# Allegro board ETDS_PCB_AN_V1_2.brd
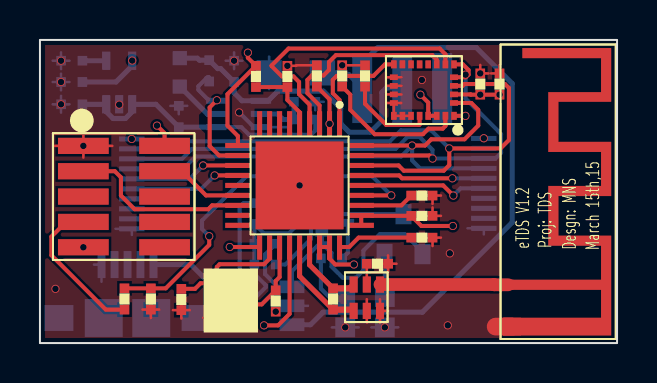
[diagram p0: board, top side]
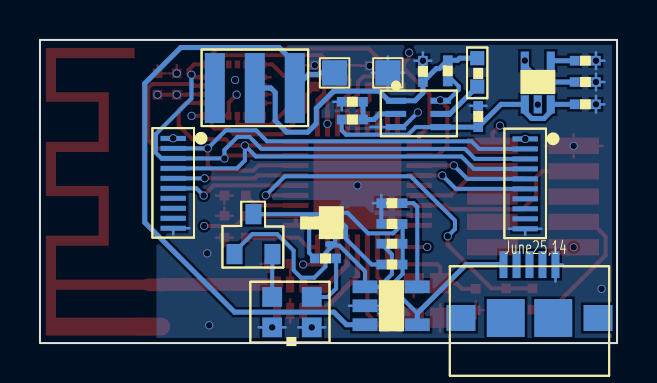
[diagram p1: board, bottom side, seen from below]

Outline 28.88 x 15.19 mm; copper layers: TOP, GND, VCC3V, BOTTOM. Coordinates in mm from the lower left corner of the outline.
Outline path: rectangle 0,0 28.88,15.19

## Design rules (mm)
nets with their own width: min track width 0.305; nets N11200813 N11200821
nets with their own width: min track width 0.508; nets ANT_OUT

## Placement (name value [footprint] x y rotation side)
C1  1uF  [C0402]  2.55 12.4 180 bottom
C2  10nF  [C0402]  2.55 13.46 180 bottom
C3  1uF  [C0402]  2.55 11.28 180 bottom
C4  22pF  [C0402]  11.11 3.07 270 top
C5  22pF  [C0402]  6.39 3.15 270 top
C7  1uF  [C0402]  18.15 6.71 0 top
C8  1uF  [C0402]  18.15 5.69 0 top
C11  22pF  [C0402]  15.93 3.29 0 top
C12  10uF  [C0402]  6.26 10.39 90 bottom
C13  10uF  [C0402]  9.03 12.65 90 bottom
C32  1uF  [C0402]  10.3 6.65 0 bottom
C40  1nF  [C0402]  4.86 3.18 270 top
C42  10uF  [C0402]  14.54 12.42 90 top
C43  0.1uF  [C0402]  23.69 12.01 90 top
C44  1nF  [C0402]  15.58 14.35 270 top
C45  100nF  [C0402]  15.81 12.42 90 top
C46  0.1uF  [C0402]  22.72 12.01 90 top
H1  Header1X1  [H1]  14.87 12.8 180 bottom
H4  Header1X1  [H1]  12.2 12.8 180 bottom
H7  Header5X1  [TE_USB_2174507-2]  4.38 1.26 180 bottom
H10  Header5X2  [H10]  5.77 5.13 180 bottom
H11  Header5X2  [H10]  23.38 5.16 180 bottom
H12  Header1X1  [ANT_W]  24.37 6.81 0 top
J2  CON5  [H5X2]  0.65 4.17 0 top
L1  10nH  [L0402]  15 1.35 90 top
L3  4.7uH  [L0805]  6.49 12.27 90 bottom
LED1  APBL3025  [LEDAP1]  14.39 3.07 0 bottom
Q1  DMP22D6UT  [MOS_DMP]  13.68 5.21 90 bottom
Q2  DMN5L06K  [MOS_DMN]  19.75 3.78 180 bottom
R4  56k  [R0402]  18.25 4.95 0 top
R9  160k  [R0402]  12.38 12.42 0 bottom
R10  1.2meg  [R0402]  14.11 10.87 180 bottom
R11  1.2meg  [R0402]  8.14 12.78 90 bottom
R28  10k  [R0402]  10.4 5.31 0 bottom
R29  8k  [R0402]  12.13 3.61 180 bottom
R40  3.9k  [R0402]  13.73 4.57 0 bottom
R41  100k  [R0402]  11.14 12.5 90 top
R42  200k  [R0402]  12.05 14.22 270 top
R43  1k  [R0402]  10.4 7.34 0 bottom
R44  2.7k  [R0402]  4.56 1.35 90 top
S1  CSS-1210B  [SWITCH]  20.79 14.71 270 bottom
U1  TPS71733  [TPS71730]  4.97 11.38 180 bottom
U2  -  [LTC4054]  13.35 3.28 270 bottom
U6  balunn  [BALUNN]  15.27 1.05 0 top
U7  1  [CC2510]  12.99 7.9 270 top
U9  Value  [TPS61220]  11.82 12.65 270 bottom
U10  -  [LSM9DS1]  19.22 12.67 180 top
Y1  26MHz  [CRYST_26M]  11.06 0.48 90 top

## Library data of the parts
C1 C12 C13 = C: room: 2
C2 C3 C11 = C: room: 1
C4 C5 C7 C8 C32 C40 C42-C46 = C
H1 = Header1X1_2: room: 2
H4 H7 = Header1X1_1: room: 2
H10 H11 = Header7X1_0
H12 = Header1X1_0: room: 1
J2 = CON5_0
L1 = INDUCTOR
L3 = INDUCTOR: room: 1
LED1 = BRPG1204_0
Q1 = MOSFET P_0
Q2 = DMN5L06K
R4 R28 R29 R40-R44 = R
R9-R11 = R: room: 1
S1 = SW_0: room: 1
U1 = TPS71730_0: room: 1
U2 = LTC4054_0
U6 = balunn
U7 = cc2510f32rspr_1
U9 = TPS61220DCKR
U10 = LSM9DS1
Y1 = CRYSTAL_2

## Footprints (pads in the part's own frame, mm; a bottom-side part is the same pattern mirrored in y, then rotated)
ANT_W
  rect 0.508x0.508 smd: 1(-0.94,-3.886)
  rect 0.889x0.889 smd: 2(-0.749,-5.982)
BALUNN
  rect 0.406x0.813 smd: 1(1.753,1.88) 2(1.092,1.88) 3(0.432,1.88) 4(0.432,0.559) 5(1.092,0.559) 6(1.753,0.559)
C0402
  rect 0.483x0.483 smd: 1(0.432,0.686) 2(1.499,0.686)
CC2510
  rect 1.27x0.254 smd: 1(-3.086,2) 2(-3.086,1.5) 3(-3.086,1) 4(-3.086,0.5) 5(-3.086,0) 6(-3.086,-0.5) 7(-3.086,-1) 8(-3.086,-1.5) 9(-3.086,-2) 19(3.086,-2) 20(3.086,-1.5) 21(3.086,-1) 22(3.086,-0.5) 23(3.086,0) 24(3.086,0.5) 25(3.086,1) 26(3.086,1.5) 27(3.086,2)
  rect 0.254x1.27 smd: 10(-2,-3.086) 11(-1.5,-3.086) 12(-1,-3.086) 13(-0.5,-3.086) 14(0,-3.086) 15(0.5,-3.086) 16(1,-3.086) 17(1.5,-3.086) 18(2,-3.086) 28(2,3.086) 29(1.5,3.086) 30(1,3.086) 31(0.5,3.086) 32(0,3.086) 33(-0.5,3.086) 34(-1,3.086) 35(-1.5,3.086) 36(-2,3.086)
  rect 4.4x4.4 smd: 37(0,0)
CRYST_26M
  rect 1.016x1.016 smd: 1(0.787,0.889) 2(2.515,2.21) 3(2.515,0.889) 4(0.787,2.21)
H1
  rect 1.27x1.27 smd: 1(0.737,0.737)
H5X2
  rect 2.54x0.813 smd: 1(1.524,5.715) 2(5.588,5.715) 3(1.524,4.445) 4(5.588,4.445) 5(1.524,3.175) 6(5.588,3.175) 7(1.524,1.905) 8(5.588,1.905) 9(1.524,0.635) 10(5.588,0.635)
H10
  rect 1.27x0.254 smd: 1(1.168,5.097) 2(1.168,4.597) 3(1.168,4.097) 4(1.168,3.596) 5(1.168,3.096) 6(1.168,2.596) 7(1.168,2.096) 8(1.168,1.596) 9(1.168,1.096) 10(1.168,0.596)
L0402
  rect 0.483x0.483 smd: 1(0.33,0.33) 2(1.397,0.33)
L0805
  rect 0.711x0.711 smd: 1(0.584,0.508) 2(2.007,0.508)
LEDAP1
  rect 0.991x0.991 smd: 1(0.889,0.762) 2(0.889,2.286) 3(2.87,0.762) 4(2.87,2.286)
LSM9DS1
  rect 0.28x0.4 smd: 1(-1.505,1.29) 6(-1.505,-1.29) 7(-1.075,-1.29) 8(-0.645,-1.29) 9(-0.215,-1.29) 10(0.215,-1.29) 11(0.645,-1.29) 12(1.075,-1.29) 13(1.505,-1.29) 18(1.505,1.29) 19(1.075,1.29) 20(0.645,1.29) 21(0.215,1.29) 22(-0.215,1.29) 23(-0.645,1.29) 24(-1.075,1.29)
  rect 0.4x0.28 smd: 2(-1.505,0.645) 3(-1.505,0.215) 4(-1.505,-0.215) 5(-1.505,-0.645) 14(1.505,-0.645) 15(1.505,-0.215) 16(1.505,0.215) 17(1.505,0.645)
LTC4054
  rect 0.635x1.245 smd: 1(0.457,0.737) 2(1.407,0.737) 3(2.357,0.737) 4(2.357,3.353) 5(0.457,3.353)
MOS_DMN
  rect 0.8x1.016 smd: 1(0.605,0.676) 2(2.504,0.676) 3(1.554,2.676)
MOS_DMP
  rect 0.4x0.635 smd: 1(0.32,0.43) 2(1.32,0.43) 3(0.82,1.73)
R0402
  rect 0.483x0.483 smd: 1(0.33,0.33) 2(1.397,0.33)
SWITCH
  rect 3.505x1 smd: 1(1.93,4.661) 2(1.93,2.661) 3(1.93,0.661)
TE_USB_2174507-2
  rect 0.4x1.35 smd: 1(-1.3,2.675) 2(-0.648,2.675) 3(0,2.675) 4(0.65,2.675) 5(1.3,2.675)
  rect 1.9x1.9 smd: 6(1.189,0) 7(-1.189,0)
  rect 1.45x1.3 smd: 8(3.429,0) 9(-3.429,0)
TPS61220
  rect 0.305x1.016 smd: 1(0.508,0.762) 2(1.168,0.762) 3(1.829,0.762) 4(1.829,2.997) 5(1.168,2.997) 6(0.508,2.997)
TPS71730
  rect 0.406x0.914 smd: 1(0.349,0.584) 2(0.999,0.584) 3(1.649,0.584) 4(1.649,2.769) 5(0.349,2.769)

## Nets
GND: C1.2 C2.2 C3.2 C4.2 C5.2 C7.2 C8.2 C11.2 C12.2 C13.2 C32.2 C40.2 C42.2 C43.2 C44.1 C45.2 C46.2 H4.1 H7.5(GND) H10.10 H11.10 H12.2 J2.1 LED1.2(-1) LED1.4(-2) R4.2 R9.2 R42.1 R43.2 U1.2(GND) U2.2(GND) U6.5(GND2) U6.6(GND3) U7.37(GND EXPOSED) U9.3(GND) U10.14(RES1) U10.15(RES2) U10.16(RES3) U10.17(RES4) U10.18(RES5) U10.19(GND1) U10.20(GND2) Y1.3(GND#3) Y1.4(GND#4)
VBAT: C13.1 L3.2 R11.2 S1.2(CONT1) U9.1(VIN)
VCC3V: C1.1 C8.1 C42.1 C43.1 C46.1 H10.1 H11.1 J2.2 J2.9 R41.2 U1.5(OUT) U7.2(DVDD#2) U7.10(DVDD#10) U7.19(AVDD#19) U7.22(AVDD#22) U7.25(AVDD#25) U7.26(AVDD#26) U7.28(GUARD) U7.29(AVDD_DREG) U10.1(VDDIO1) U10.3(VDDIO2) U10.22(VDD1) U10.23(VDD2)
ANT_OUT: H12.1 U6.1(UBP)
BAT: H1.1 S1.1(POLE) U2.3(BAT)
DDEN: R11.1 U7.11(P0_5) U9.6(EN)
DEN_AG: U7.1(P1_2) U10.13(DEN_AG)
RESET_N: C40.1 R44.2 U7.31(RESET_N)
SPI_MISO: H10.3 H11.3 U7.35(P1_4) U10.5(SDO_AG) U10.6(SDO_M)
SPI_MOSI: H10.2 H11.2 U7.34(P1_5) U10.4(SDI)
SPI_NCS_S1: H10.5 U7.12(P0_6)
SPI_NCS_S2: H10.6 U7.13(P0_7)
SPI_NCS_S3: H11.5 U7.33(P1_6)
SPI_NCS_S4: H11.6 U7.32(P1_7)
SPI_NCS_S5: U7.3(P1_1) U10.8(CS_M)
SPI_NCS_S6: U7.4(P1_0) U10.7(CS_AG)
SPI_SCK: H10.4 H11.4 U7.36(P1_3) U10.2(SCL/SPC)
V_5V: C32.1 H7.1(5V) Q1.2(DRAIN) R28.1 R29.2 U2.4(VCC)
N11200809: C11.1 U6.2(GND1)
N11200813: L1.2 U6.3(BP1) U7.24(RF_N)
N11200821: L1.1 U6.4(BP2) U7.23(RF_P)
N11200881: R41.1 R42.2 U7.5(P0_0)
N11201053: C7.1 U7.30(DCOUPL)
N11201105: R4.1 U7.27(RBIAS)
N11201161: C4.1 U7.21(XOSC_Q1) Y1.1
N11201169: C5.1 U7.20(XOSC_Q2) Y1.2
N11201465: J2.7 R44.1
N11201477: J2.3 U7.16(P2_2)
N11201481: J2.4 U7.15(P2_1)
N11202227: Q2.3(D) R29.1
N11202241: Q1.1(GATE) Q2.1(G) R28.2 U2.1(\\C\H\R\G)
N11202285: LED1.3(GREEN) Q2.2(S)
N11202289: LED1.1(RED) R40.1
N11202301: Q1.3(SOURCE) R40.2
N11202415: R43.1 U2.5(PROG)
N11206787: C3.1 C12.1 R10.1 U1.1(IN) U1.3(EN) U9.4(VOUT)
N11206925: C2.1 U1.4(NR/FB)
N11207137: R9.1 R10.2 U9.2(FB)
N11207183: L3.1 U9.5(L)
N11212186: C44.2 U10.21(CAP)
N11213351: C45.1 U10.24(C1)

Pads without a net: H7 2 3 4 6 7 8 9; H10 7 8 9; H11 7 8 9; J2 5 6 8 10; S1 3; U7 6 7 8 9 14 17 18; U10 9 10 11 12

## Via types
v1: diameter 0.406, hole 0.33, TOP to BOTTOM, 44 vias

## Routing (per net, layer and track width the routed paths; a pad name or vN(x,y) marks a point on that pad's centre or on a via; arc(x,y) is an arc through that point)
GND: length 55.6
  TOP w0.127: R4.2 20.07,5.28 ; R4.2 19.65,4.86 ; R4.2 19.23,5.28 ; 5.55,1.26 C40.2 ; C40.2 5.55,2.1 ; C40.2 5.13,1.68 ; C40.2 5.97,1.68 ; U10.17 U10.18 U10.19 U10.20 ; U10.17 17.33,12.03 ; U10.17 18.09,12.03 ; 10.17,2.31 Y1.3 10.86,3 ; v1(12.38,13.89) 12.81,13.89 12.84,13.92 C42.2 ; 16.36,2.2 U6.5 16.36,1.03 ; C11.2 17.42,4.39 ; C11.2 17,3.98 ; C11.2 17.42,3.56 ; C11.2 17.84,3.98 ; 22.45,13.51 v1(22.03,13.51) 22.03,13.93 ; 22.58,13.51 C43.2 23,13.93 ; 17.33,13.32 U10.14 18.09,13.32 ; v1(2.17,9.88) 3.62,9.88 ; v1(2.17,9.88) 2.17,10.47 ; v1(2.17,9.88) 0.72,9.88 ; v1(2.17,9.88) 2.17,9.3 ; U6.6 17.4,1.61 ; U6.6 17.02,2.2 ; U6.6 17.02,1.03 ; C5.2 7.49,1.65 ; C5.2 7.07,2.07 ; C5.2 6.65,1.65 ; C5.2 7.07,1.23 ; 17.33,12.46 U10.16 18.09,12.46 ; 18.09,12.89 U10.15 17.33,12.89 ; C8.2 19.65,6.8 ; C8.2 19.23,6.38 ; C8.2 20.07,6.38 ; 19.65,6.97 C7.2 ; C7.2 19.23,7.39 ; C7.2 20.07,7.39 ; 8.85,0.58 Y1.4 ; Y1.4 8.85,1.96 ; Y1.4 8.17,1.27 ; v1(15.13,13.92) C44.1
  TOP w0.889: H12.2 22.81,0.83
  BOTTOM w0.127: v1(9.72,14.15) 10.14,14.15 ; v1(9.72,14.15) 9.72,14.57 ; v1(9.72,14.15) 9.72,13.73 ; v1(9.72,14.15) 9.3,14.15 ; C12.2 7.37,11.89 ; C12.2 6.95,11.47 ; C12.2 6.53,11.89 ; v1(1.05,13.08) 1.47,13.08 ; v1(1.05,13.08) 1.05,12.66 ; v1(1.05,13.08) 0.63,13.08 ; v1(1.05,13.08) 1.05,13.5 ; 2.7,3.93 H7.5 ; H7.5 3.08,3.08 ; H7.5 3.08,4.79 ; 14.6,0.79 v1(15.28,0.79) 15.95,0.79 ; 13.78,11.67 R9.2 ; R9.2 14.2,12.09 ; R9.2 13.36,12.09 ; 0.63,14.15 v1(1.05,14.15) ; v1(1.05,14.15) 1.47,14.15 ; v1(1.05,14.15) 1.05,14.57 ; v1(1.05,14.15) 1.05,13.73 ; 12.34,10.82 U9.3 ; 11.38,7.01 R43.2 ; R43.2 12.22,7.01 ; R43.2 11.8,7.43 ; 13.41,1.87 U2.2 11.81,1.87 ; 3.78,5.73 H10.10 ; H10.10 4.6,5.42 ; H10.10 5.41,5.73 ; 0.63,11.96 v1(1.05,11.96) ; v1(1.05,11.96) 1.05,12.38 ; v1(1.05,11.96) 1.05,11.54 ; v1(1.05,11.96) 1.47,11.96 ; 16.59,0.79 v1(17.26,0.79) 17.93,0.79 ; 22.21,5.45 H11.10 21.4,5.75 ; H4.1 12.28,13.54 ; H4.1 11.47,14.35 ; H4.1 11.47,12.72 ; H4.1 10.65,13.54
  BOTTOM w0.203: U9.3 10.71,10.82 v1(9.97,11.56) ; U1.2 v1(3.97,11.95) ; R43.2 C32.2
  vias: v1(0.77,2.72) v1(11.8,1.57) v1(12.99,7.9) v1(19.11,13.18) v1(20.41,0.89) v1(20.51,4.5)
VBAT: length 15.6
  BOTTOM w0.254: S1.2 17.32,12.78 17.11,12.56 17.11,11.14 16.53,10.57 15.48,10.57 15.05,11 15.05,11.76 14.19,12.62 11.9,12.62 11.42,12.14 U9.1 10.11,12.14 9.72,12.53 C13.1 9.04,13.75 8.89,13.75 R11.2 7.98,14.17 7.87,14.27 L3.2
VCC3V: length 30.6
  TOP w0.203: v1(20.66,5.87) 19.09,5.87 C8.1 16.61,6.38 16.59,6.4 U7.29 U7.28 ; U10.1 v1(21.29,11.38) ; U7.25 U7.26 14.49,4.23 14.78,3.94 v1(15.71,3.94) ; U7.10 9.91,10.38 9.39,10.9 9.39,12.47 R41.2 10.4,14.3 v1(10.4,14.55) ; v1(14.49,10.99) 14.49,12.21 13.86,12.85 C42.1 ; v1(11.21,0.89) 11.92,0.89 12.49,1.46 U7.22 ; J2.2 6.24,10.52 v1(5.85,10.9) ; U10.3 21.55,12.46 21.56,12.45 v1(22.03,12.45) v1(23,12.45) ; v1(19.04,12.45) 19.43,12.05 U10.22 U10.23 ; U7.19 v1(9.5,4.81)
  BOTTOM w0.203: H11.1 v1(22.21,10.26) ; U1.5 v1(4.62,14.15) ; H10.1 v1(4.59,10.23)
  BOTTOM w0.254: U1.5 4.62,13.89 3.8,13.08 C1.1
  vias: v1(2.17,4.8)
ANT_OUT: length 6.4
  TOP w0.635: U6.1 22.72,2.93 22.73,2.92 H12.1
BAT: length 32.2
  BOTTOM w0.254: H1.1 14.86,13.54 14.94,13.46 15.44,13.46 S1.1 16.13,14.03 16.91,14.81 21.83,14.81 23.63,13 23.63,6.05 19.14,1.55 14.17,1.55 13.54,0.92 U2.3
DDEN: length 6.3
  TOP w0.203: U7.11 8.97,9.4 8.49,9.87 8.49,11.81 v1(8.85,12.17)
  BOTTOM w0.203: U9.6 8.47,12.14 7.92,12.69 7.92,12.86 8.38,13.32 8.45,13.32 8.47,13.3 R11.1
DEN_AG: length 5.7
  TOP w0.203: U10.13 17.27,13.96 16.69,13.39 14.85,13.39 14.66,13.19 14.66,12.52 14.99,12.18 U7.1
RESET_N: length 18.8
  TOP w0.203: R44.2 C40.1 6.29,2.74 8.47,4.92 v1(8.47,5.35) ; U7.31 v1(17.58,7.4)
  BOTTOM w0.203: v1(17.58,7.4) 16.62,8.36 10.33,8.36 8.11,6.14 8.11,5.71 v1(8.47,5.35)
SPI_MISO: length 30
  TOP w0.203: 21.31,13.45 v1(21.3,13.45) ; 21.31,13.45 21.45,13.45 21.45,13.68 21.16,13.96 U10.6 ; 21.31,13.45 21.31,13.32 U10.5 ; U7.35 19.49,9.4 v1(19.65,9.25)
  BOTTOM w0.203: v1(21.3,13.45) 21.3,12.25 23.08,10.47 23.08,9.53 22.8,9.25 H11.3 19.65,9.25 v1(19.65,9.25) 19.65,9.68 18.99,10.33 18.4,10.33 17.79,9.73 7.61,9.73 7.11,9.23 H10.3
SPI_MOSI: length 32.5
  TOP w0.203: U10.4 21.15,12.89 21.24,12.98 23.27,12.98 23.47,12.78 23.47,10.17 23.05,9.75 v1(20.49,9.75) 20.49,8.92 20.21,8.64 18.21,8.64 17.95,8.9 U7.34
  BOTTOM w0.203: H11.2 20.49,9.75 v1(20.49,9.75) 19.58,10.66 18.07,10.66 17.51,10.11 7.28,10.11 6.9,9.73 H10.2
SPI_NCS_S1: length 5.6
  TOP w0.203: v1(8.17,8.9) U7.12
  BOTTOM w0.203: v1(8.17,8.9) 7.49,8.23 H10.5
SPI_NCS_S2: length 5.6
  TOP w0.203: U7.13 v1(8.74,8.4)
  BOTTOM w0.203: v1(8.74,8.4) 8.07,7.73 H10.6
SPI_NCS_S3: length 6.2
  TOP w0.203: U7.33 17.98,8.4 18.12,8.25 v1(20.64,8.25)
  BOTTOM w0.203: H11.5 20.64,8.25 v1(20.64,8.25)
SPI_NCS_S4: length 6.5
  TOP w0.203: U7.32 20.18,7.9 v1(20.69,7.39)
  BOTTOM w0.203: H11.6 21.05,7.75 v1(20.69,7.39)
SPI_NCS_S5: length 10
  TOP w0.203: U10.8 19.86,14.2 19.63,14.43 14.81,14.43 14.47,14.08 14.47,13.68 14.19,13.41 13.61,13.41 13.39,13.19 13.39,12.52 13.99,11.91 U7.3
SPI_NCS_S6: length 13.7
  TOP w0.203: U7.4 13.49,11.94 12.97,12.47 12.97,13.08 12.69,13.36 12.11,13.36 11.6,13.88 11.6,13.91 12.44,14.76 20,14.76 20.29,14.47 U10.7
SPI_SCK: length 27.4
  TOP w0.203: U10.2 21.59,12.03 21.93,11.68 21.93,10.9 21.25,10.21 19.58,10.21 19.27,9.9 v1(18.62,9.9) U7.36
  BOTTOM w0.203: H11.4 19.02,8.75 18.62,9.15 v1(18.62,9.9) 18.07,9.35 7.79,9.35 7.17,8.73 H10.4
V_5V: length 15.1
  BOTTOM w0.203: 9.99,1.49 11.3,2.8 11.3,2.9 10.73,3.47 R29.2 R28.1 C32.1 11.2,5.5 12.46,5.5 13.49,6.53 Q1.2
  BOTTOM w0.254: H7.1 7.55,3.93 9.99,1.49 U2.4
N11200809: length 1
  TOP w0.127: C11.1 U6.2
N11200813: length 3.7
  TOP w0.254: L1.2 13.49,3.92 U7.24
  TOP w0.305: L1.2 15.51,2.74 U6.3
N11200821: length 4.9
  TOP w0.254: L1.1 12.99,3.35 U7.23
  TOP w0.305: U6.4 15.63,1.68 L1.1
N11200881: length 3.7
  TOP w0.203: R41.1 R42.2 12.38,12.18 12.99,11.57 U7.5
N11201053: length 2.7
  TOP w0.203: U7.30 18.09,6.9 C7.1
N11201105: length 3.8
  TOP w0.203: R4.1 15.94,5.28 15.47,4.81 U7.27
N11201161: length 4.4
  TOP w0.203: U7.21 11.99,3.31 11.8,3.11 C4.1 11.1,1.94 10.84,1.94 Y1.1
N11201169: length 6.1
  TOP w0.203: C5.1 7.76,2.72 8.04,3 Y1.2 8.85,3.81 8.99,3.95 11.21,3.95 11.49,4.23 U7.20
N11201465: length 7.6
  TOP w0.203: R44.1 3.3,1.68 0.57,4.4 0.57,5.33 1.31,6.07 J2.7
N11201477: length 9.1
  TOP w0.203: U7.16 8.61,6.9 8.42,6.71 4.74,6.71 4.05,7.39 4.05,8.31 3.75,8.61 J2.3
N11201481: length 4.2
  TOP w0.203: J2.4 7.1,8.61 8.31,7.4 U7.15
N11202227: length 7.8
  BOTTOM w0.203: R29.1 12.28,3.94 13.56,5.22 13.56,5.82 13.79,6.05 14.59,6.05 15,6.46 Q2.3
N11202241: length 15.7
  BOTTOM w0.203: 14.11,5 14.59,4.51 14.59,3.84 15.15,3.28 15.81,3.28 16.18,3.65 16.18,4.63 17.01,5.46 18.25,5.46 19.14,4.57 Q2.1 ; 14.11,5 14.49,5 14.49,4.91 14.47,4.88 13.89,4.88 12.61,3.6 U2.1 11.9,2.82 11.26,3.45 11.26,4.44 R28.2 ; 14.11,5 Q1.1
N11202285: length 2.2
  BOTTOM w0.203: LED1.3 17.26,3.71 17.24,3.72 Q2.2
N11202289: length 2.9
  BOTTOM w0.203: LED1.1 14.48,2.31 14.06,2.73 R40.1
N11202301: length 1.9
  BOTTOM w0.203: R40.2 15.41,4.52 Q1.3
N11202415: length 4.8
  BOTTOM w0.203: R43.1 10.19,7.01 9.99,6.82 U2.5
N11206787: length 13.9
  BOTTOM w0.203: R10.1 13.78,10.66 13.56,10.44 10.46,10.44 10.08,10.82 U9.4
  BOTTOM w0.254: C3.1 U1.3 3.32,11.59 3.66,11.25 4.28,11.25 4.62,11.59 U1.1 5.8,11.96 C12.1 U9.4
N11206925: length 1.2
  BOTTOM w0.254: C2.1 U1.4
N11207137: length 2.7
  BOTTOM w0.254: U9.2 11.89,11.48 12.17,11.2 R10.2 R9.1
N11207183: length 2.4
  BOTTOM w0.254: L3.1 8.37,11.48 U9.5
N11212186: length 4.5
  TOP w0.203: U10.21 19,10.96 18.97,10.93 17.33,10.93 16.27,11.99 C44.2
N11213351: length 7.3
  TOP w0.203: U10.24 20.29,10.88 20.15,10.74 19.44,10.74 19.16,10.46 16.75,10.46 15.53,11.69 15.53,12.45 C45.1

## Copper pours and planes (outline as drawn; the poured copper is in the pictures)
GND on TOP: 0.25,0.25 0.25,14.93 23.05,14.93 23.05,0.25 ; 9 cut-outs
GND on BOTTOM: 0.25,0.25 0.25,14.93 23.05,14.93 23.05,0.25 ; 15 cut-outs
GND on GND: 0.25,0.25 0.25,14.93 23.05,14.93 23.05,0.25
VCC3V on VCC3V: 0.25,0.25 0.25,14.93 23.05,14.93 23.05,0.25
ANT_OUT on TOP (solid shape): 28.59,12.09 25.95,12.09 25.95,10.08 28.59,10.08 28.59,7.37 25.95,7.37 25.95,5.38 28.59,5.38 28.59,0.38 23.18,0.38 23.18,1.27 28.08,1.27 28.08,2.67 23.18,2.67 23.18,3.18 28.08,3.18 28.08,4.88 25.44,4.88 25.44,7.87 28.08,7.87 28.08,9.58 25.44,9.58 25.44,12.57 28.08,12.57 28.08,14.27 24.14,14.27 24.14,14.78 28.59,14.78

## Text on the board
Ref Des/Silkscreen Bottom: June25,14
Ref Des/Silkscreen Top: eTDS V1.2 | Proj: TDS | Desgn: MNS | March 15th,15
